# Altium PCB HandleBoard.PcbDoc
Units mm, origin at the board's own origin, x right, y up, seen from the top; angles counter-clockwise.
Board outline 50 x 50 mm, 2 copper layers (Top Layer, Bottom Layer); 26 components, 0 nets, 60 pads, 0 vias.
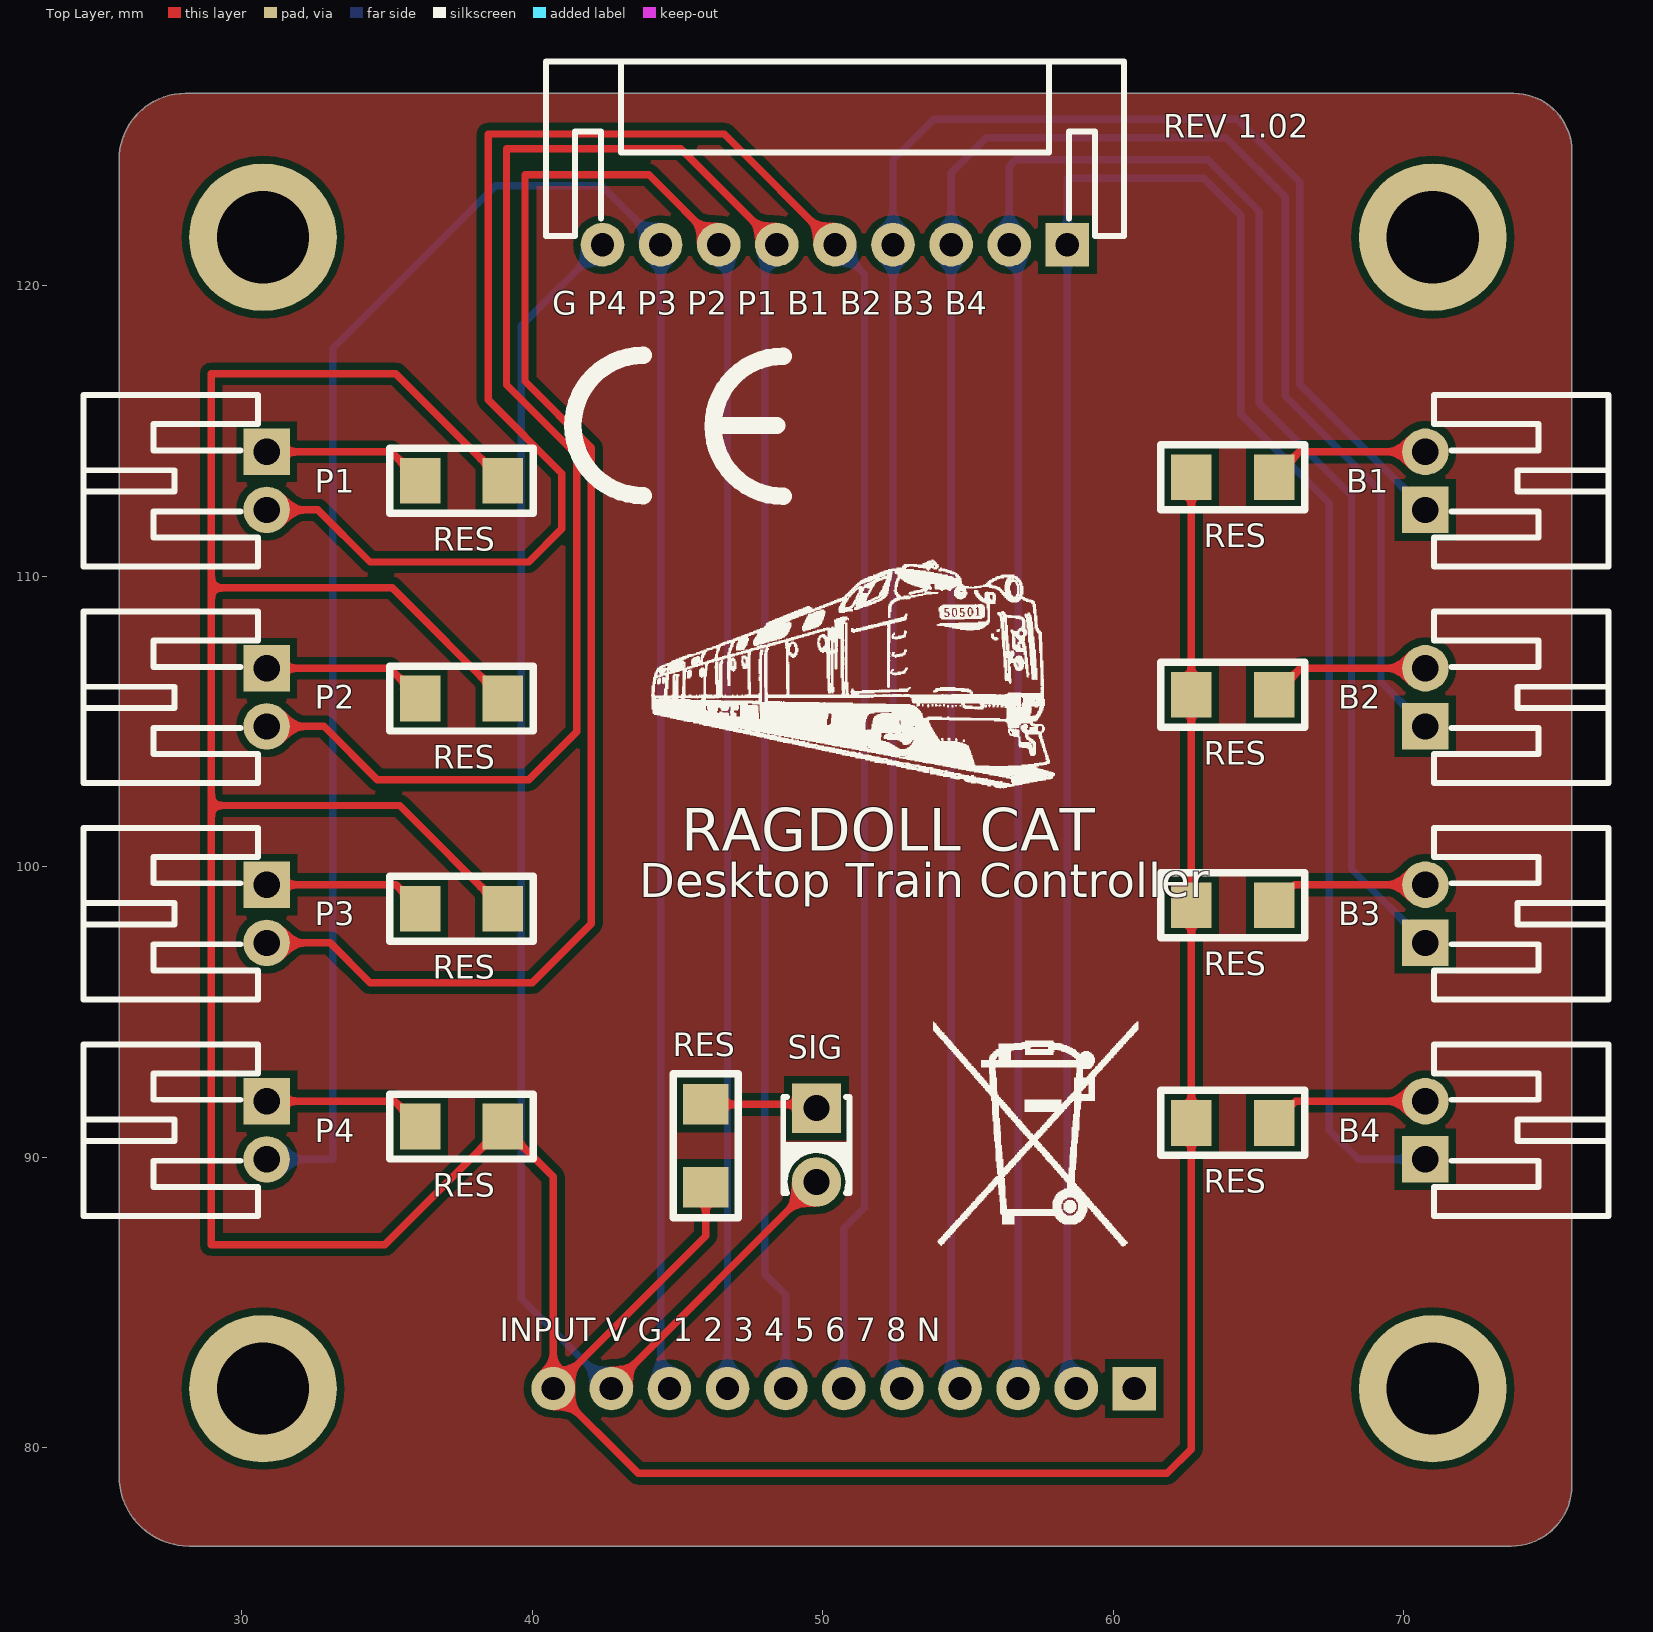
[diagram p0: Top Layer view]
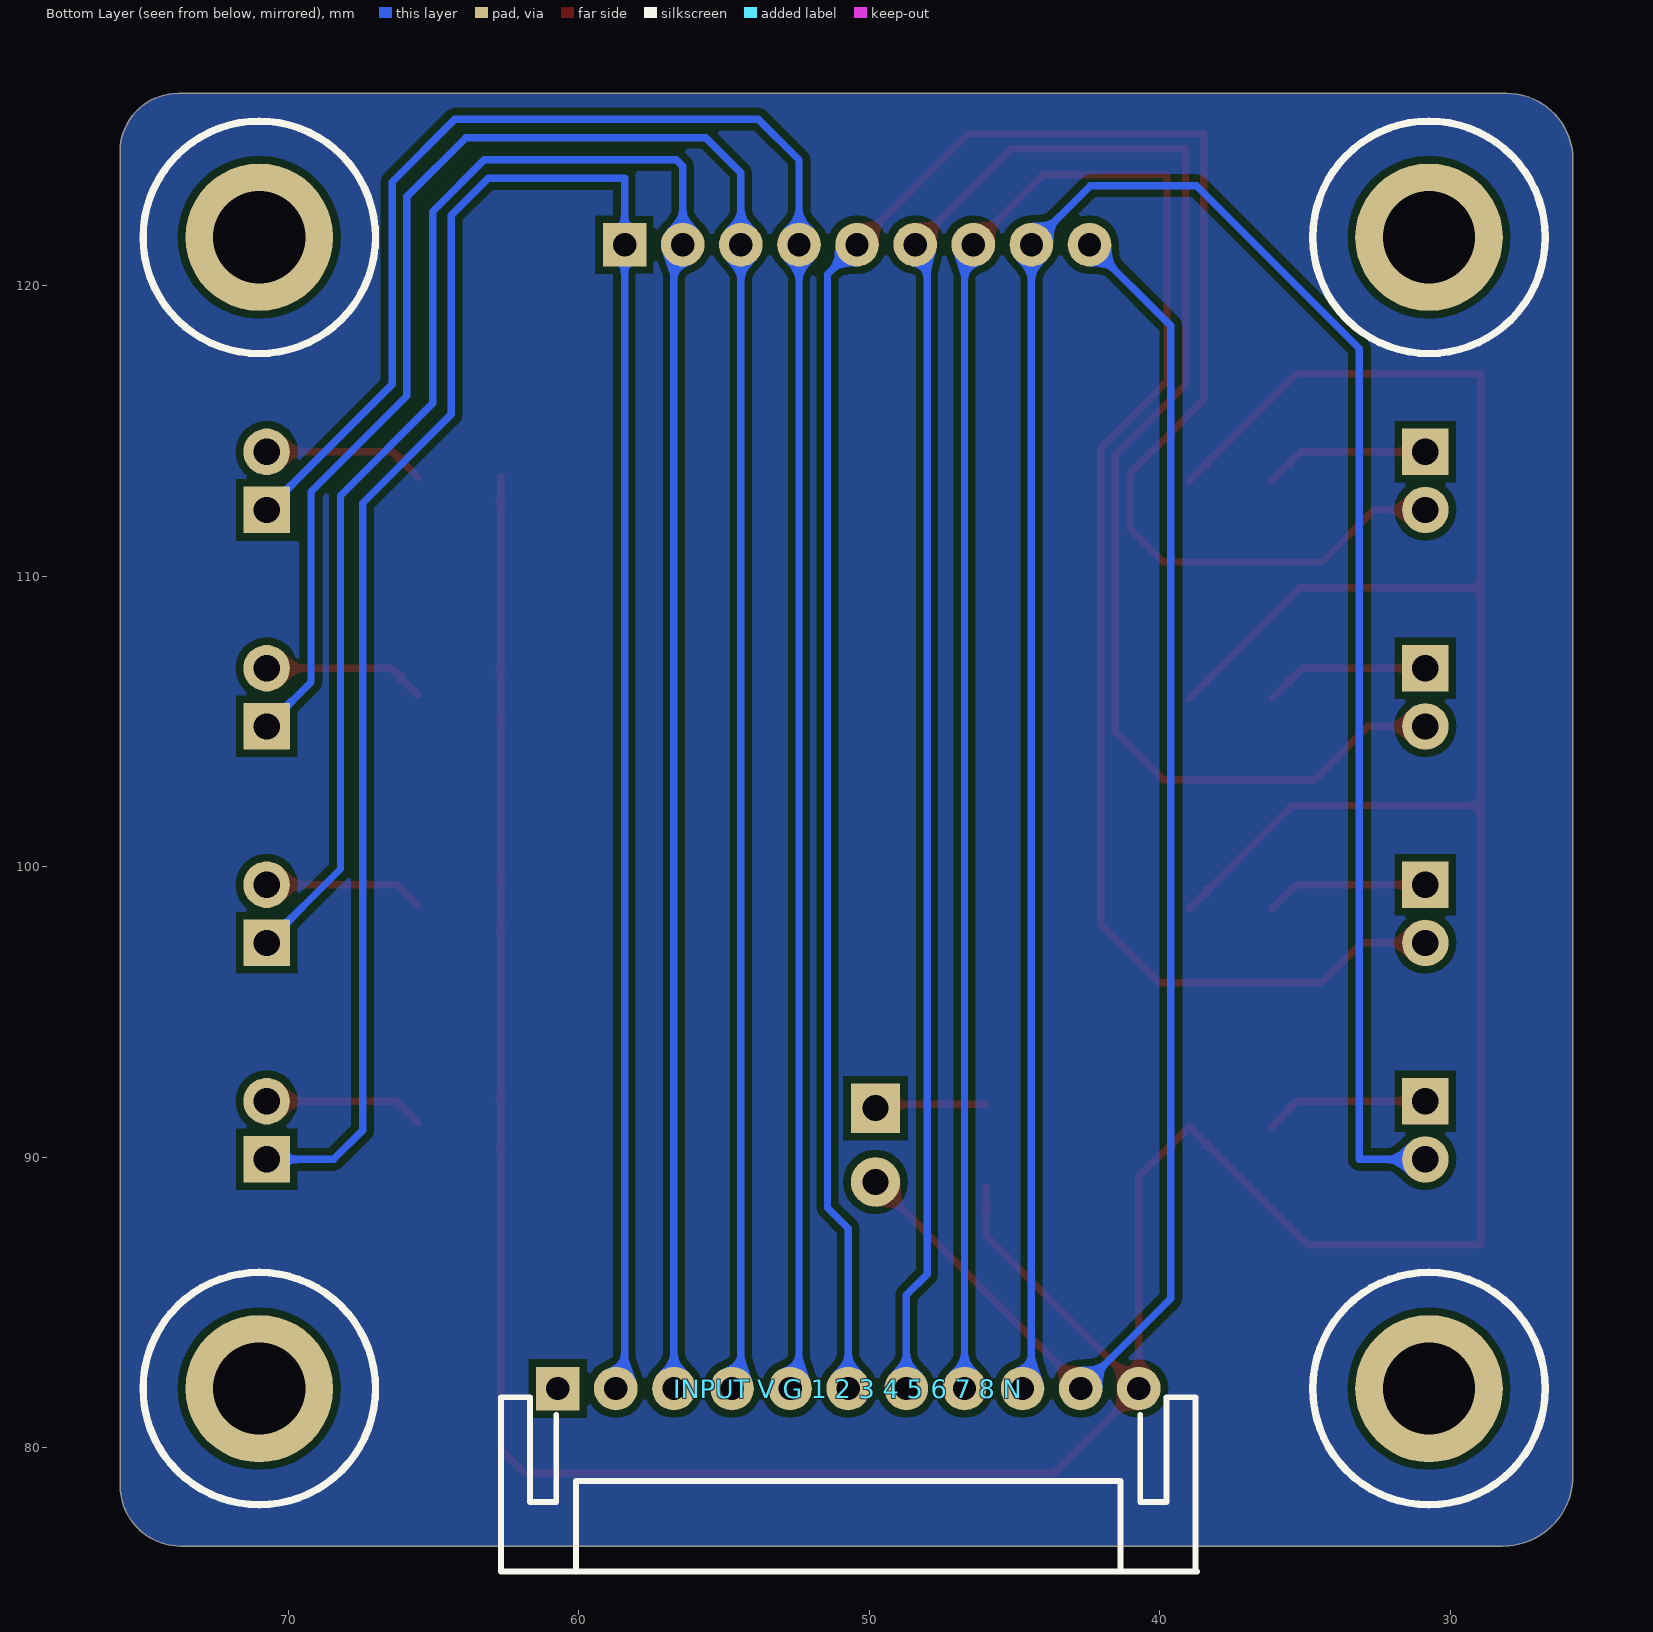
[diagram p1: Bottom Layer view, seen from below]

## Layer stack, top to bottom
Top Solder: solder mask 0.0102, Solder Resist, Dk 3.5
Top Layer: signal copper 0.0356
Dielectric 1: dielectric 0.32, FR-4, Dk 4.8
Bottom Layer: signal copper 0.0356
Bottom Solder: solder mask 0.0102, Solder Resist, Dk 3.5

## Board outline
25.781,79.032 25.781,124.333 cw(c28.067,124.333) 28.067,126.619 73.787,126.619 cw(c73.787,124.625) 75.781,124.625 75.781,78.702 cw(c73.698,78.702) 73.698,76.619 28.194,76.619 cw(c28.194,79.032)

## Design rules (kind name [scope] priority, off if disabled: settings)
Clearance [All] p1: gap=0.254 ignorepadtopadclearanceinfootprint=FALSE except(0: Arc-Hole Track-Hole SMDPad-Hole THPad-Hole Via-Hole Fill-Hole Poly-Hole Region-Hole Text-Hole)
PolygonConnect [All] p1: connectstyle=Relief reliefconductorwidth=0.254 reliefentries=4 polygonreliefangle="90 Angle" airgapwidth=0.254
RoutingVias [All] p1: holewidth=0.711 width=1.27 viastyle="Through Hole" minholewidth=0.711 minwidth=1.27 maxholewidth=0.711 maxwidth=1.27
SolderMaskExpansion [All] p1: expansion=0.102
Width [All] p1: maxlimit=0.254 minlimit=0.254 preferedwidth=0.254
30 further rules are at their usual default settings.

## Components (designator, comment, footprint, x,y, rotation, side; value= is the part's Value field where it differs from the comment)
B1 "Comment" PH2.0-WI-2P 70.739,113.284 r90 top
B2 "Comment" PH2.0-WI-2P 70.739,105.833 r90 top
B3 "Comment" PH2.0-WI-2P 70.739,98.383 r90 top
B4 "Comment" PH2.0-WI-2P 70.739,90.932 r90 top
"G P4 P3 P2 P1 B1 B2 B3 B4" "Comment" PH2.0-WI-9P 50.419,121.412 r180 top
"INPUT V G 1 2 3 4 5 6 7 8 N" "Comment" PH2.0-WI-11P 50.723,82.042 r180 bottom
P1 "Comment" PH2.0-WI-2P 30.861,113.284 r270 top
P2 "Comment" PH2.0-WI-2P 30.861,105.833 r270 top
P3 "Comment" PH2.0-WI-2P 30.861,98.383 r270 top
P4 "Comment" PH2.0-WI-2P 30.861,90.932 r270 top
RES "Comment" "R 1206-HP_L" 64.135,113.411 r180 top
RES "Comment" "R 1206-HP_L" 64.135,105.918 r180 top
RES "Comment" "R 1206-HP_L" 64.135,98.679 r180 top
RES "Comment" "R 1206-HP_L" 64.135,91.186 r180 top
RES "Comment" "R 1206-HP_L" 37.592,91.059 r180 top
RES "Comment" "R 1206-HP_L" 37.592,98.552 r180 top
RES "Comment" "R 1206-HP_L" 37.592,105.791 r180 top
RES "Comment" "R 1206-HP_L" 37.592,113.284 r180 top
RES "Comment" "R 1206-HP_L" 45.974,90.424 r270 top
SIG "Comment" "LED F234-Y" 49.784,90.424 r270 top
? "Comment" ICO3 57.379,90.805 r0 top
? "Comment" CE 43.815,115.189 r0 top
? "Comment" M3x12_L 70.993,82.042 r180 bottom
? "Comment" M3x12_L 30.734,82.042 r180 bottom
? "Comment" M3x12_L 70.993,121.666 r180 bottom
? "Comment" M3x12_L 30.734,121.666 r180 bottom

## Footprints (in the part's own frame and the unit in brackets; to place one, negate y for a bottom-side part, rotate by r counter-clockwise, add the part's x,y. Pads: shape width x height; smd on the part's side, far side on the other; paste and mask are expansions set on the pad)
CE [mm]
  silkscreen extent -2.41,-2.44 4.83,2.41
ICO3 [mm]
  silkscreen extent -3.58,-3.86 3.48,3.86
"LED F234-Y" [mm] "黄色2mm*3mm*4mm(长*宽*高)"
  rect 1.7x1.7 hole 0.9: 1(-1.27,0)
  round 1.7 hole 0.9: 2(1.27,0)
  silkscreen extent -1.65,-1.14 1.65,1.14, body extent -1.52,-1 1.52,1, height 4.05
M3x12_L [mm] "M3铜柱，长：12mm"
  round 5.08 hole 3.175: 1(0,0)
  silkscreen extent -4,-4 4,4, body extent -2.7,-2.35 2.7,2.35, height 12.05
PH2.0-WI-2P [mm] "长：5.9mm，宽：6mm，高：4.7mm"
  rect 1.6x1.6 hole 0.9: 1(-1,0)
  round 1.6 hole 0.9: 2(1,0)
  silkscreen extent -2.95,-6.3 2.95,-0.3, body extent -2.95,-6.3 2.95,0.3, height 4.75
PH2.0-WI-9P [mm] "长：19.9mm，宽：6mm，高：4.7mm"
  rect 1.5x1.5 hole 0.8: 1(-8,0)
  round 1.5 hole 0.8: 2(-6,0) 3(-4,0) 4(-2,0) 5(0,0) 6(2,0) 7(4,0) 8(6,0) 9(8,0)
  silkscreen extent -9.95,-6.3 9.95,-0.3, body extent -9.95,-6.3 9.95,0.3, height 4.75
PH2.0-WI-11P [mm] "长：23.9mm，宽：6mm，高：4.7mm"
  rect 1.5x1.5 hole 0.8: 1(-10,0)
  round 1.5 hole 0.8: 2(-8,0) 3(-6,0) 4(-4,0) 5(-2,0) 6(0,0) 7(2,0) 8(4,0) 9(6,0) 10(8,0) 11(10,0)
  silkscreen extent -11.95,-6.3 12,-0.3, body extent -11.95,-6.3 11.95,0.3, height 4.75
"R 1206-HP_L" [mil] "1/4W高精度贴片电阻"
  rect 55x62 smd: 1(-55.12,0) 2(57.09,0)
  silkscreen extent -96,-44 98,44, body extent -63,-31 63,32, height 22

## Nets (pads, with @x,y where several pads share a name; then routed paths per layer and width w, separated by ;. In a path a pad name is that pad's centre, name@x,y a point inside that pad or via, vN(x,y) a via of type N, cw(c..) or ccw(c..) an arc to the next point about the centre after c; other vN are vias at no path point)
pads on no net: "G P4 P3 P2 P1 B1 B2 B3 B4.1" "G P4 P3 P2 P1 B1 B2 B3 B4.2" "G P4 P3 P2 P1 B1 B2 B3 B4.3" "G P4 P3 P2 P1 B1 B2 B3 B4.4" "G P4 P3 P2 P1 B1 B2 B3 B4.5" "G P4 P3 P2 P1 B1 B2 B3 B4.6" "G P4 P3 P2 P1 B1 B2 B3 B4.7" "G P4 P3 P2 P1 B1 B2 B3 B4.8" "G P4 P3 P2 P1 B1 B2 B3 B4.9" "INPUT V G 1 2 3 4 5 6 7 8 N.1" "INPUT V G 1 2 3 4 5 6 7 8 N.2" "INPUT V G 1 2 3 4 5 6 7 8 N.3" "INPUT V G 1 2 3 4 5 6 7 8 N.4" "INPUT V G 1 2 3 4 5 6 7 8 N.5" "INPUT V G 1 2 3 4 5 6 7 8 N.6" "INPUT V G 1 2 3 4 5 6 7 8 N.7" "INPUT V G 1 2 3 4 5 6 7 8 N.8" "INPUT V G 1 2 3 4 5 6 7 8 N.9" "INPUT V G 1 2 3 4 5 6 7 8 N.10" "INPUT V G 1 2 3 4 5 6 7 8 N.11" ?.1 B1.1 B1.2 B2.1 B2.2 B3.1 B3.2 B4.1 B4.2 P1.1 P1.2 P2.1 P2.2 P3.1 P3.2 P4.1 P4.2 RES.1 RES.2 SIG.1 SIG.2
copper on no net: | length 897
  Top Layer w0.254: 28.956,102.108 35.436,102.108 38.992,98.552 ; 28.956,109.601 35.182,109.601 38.992,105.791 ; 30.861,91.932 35.269,91.932 36.142,91.059 ; 30.861,97.383 33.046,97.383 34.417,96.012 40.005,96.012 42.037,98.044 42.037,114.427 39.751,116.713 39.751,123.825 44.006,123.825 46.419,121.412 ; 30.861,99.383 35.311,99.383 36.142,98.552 ; 30.861,104.833 32.835,104.833 34.671,102.997 39.878,102.997 41.529,104.648 41.529,114.173 39.116,116.586 39.116,124.714 45.117,124.714 48.419,121.412 ; 30.861,106.833 35.1,106.833 36.142,105.791 ; 30.861,112.284 32.623,112.284 34.417,110.49 39.878,110.49 41.021,111.633 41.021,113.538 38.481,116.078 38.481,125.222 46.609,125.222 50.419,121.412 ; 30.861,114.284 35.142,114.284 36.142,113.284 ; 38.992,113.284 35.309,116.967 28.956,116.967 28.956,86.995 34.928,86.995 38.992,91.059 40.723,89.328 40.723,82.042 ; 42.723,82.042 42.723,82.093 49.784,89.154 ; 45.974,88.974 45.974,87.293 40.723,82.042 ; 45.974,91.824 49.654,91.824 49.784,91.694 ; 62.685,113.411 62.685,105.918 62.685,98.679 62.685,91.186 62.685,79.957 61.849,79.121 43.644,79.121 40.723,82.042 ; 65.535,91.186 66.281,91.932 70.739,91.932 ; 65.535,98.679 66.239,99.383 70.739,99.383 ; 65.535,105.918 66.45,106.833 70.739,106.833 ; 65.535,113.411 66.408,114.284 70.739,114.284
  Bottom Layer w0.254: 30.861,89.932 33.131,89.932 33.131,117.84 38.735,123.444 42.387,123.444 44.419,121.412 44.419,82.346 44.723,82.042 ; 42.419,121.412 39.624,118.617 39.624,85.141 42.723,82.042 ; 46.419,121.412 46.723,121.108 46.723,82.042 ; 48.419,121.412 48.006,120.999 48.006,85.979 48.723,85.262 48.723,82.042 ; 50.419,121.412 51.435,120.396 51.435,88.265 50.723,87.553 50.723,82.042 ; 52.723,82.042 52.419,82.346 52.419,121.412 52.419,124.333 53.816,125.73 64.262,125.73 66.421,123.571 66.421,116.602 70.374,112.649 70.739,112.284 ; 54.723,82.042 54.419,82.346 54.419,121.412 54.419,123.888 55.626,125.095 63.881,125.095 65.913,123.063 65.913,116.205 69.215,112.903 69.215,106.357 70.739,104.833 ; 56.723,82.042 56.723,121.108 ; 58.723,82.042 58.419,82.346 58.419,121.412 58.419,121.792 58.419,123.698 63.119,123.698 64.389,122.428 64.389,115.57 67.437,112.522 67.437,90.932 68.437,89.932 70.739,89.932 ; 70.739,97.383 68.199,99.923 68.199,112.776 65.024,115.951 65.024,122.555 63.246,124.333 56.642,124.333 56.419,124.11 56.419,121.412 ; 56.419,121.412 56.723,121.108 ; 56.419,121.412 56.723,121.108

## Polygon pours and split planes (outlines as drawn)
no net on Top Layer "Top Layer-No Net" (solid, pour order 2): 25.781,79.032 25.781,124.333 cw(c28.067,124.333) 28.067,126.619 73.787,126.619 cw(c73.787,124.625) 75.781,124.625 75.781,78.702 cw(c73.698,78.702) 73.698,76.619 28.194,76.619 cw(c28.194,79.032)
no net on Bottom Layer "Top Layer-No Net1" (solid, pour order 3): 25.781,79.032 25.781,124.333 cw(c28.067,124.333) 28.067,126.619 73.787,126.619 cw(c73.787,124.625) 75.781,124.625 75.781,78.702 cw(c73.698,78.702) 73.698,76.619 28.194,76.619 cw(c28.194,79.032)

## Silkscreen, mask and mechanical layers (free items; w line width, h text height)
Top Overlay:
  drawing of 3490 lines, arcs and shapes, not listed
  text "REV 1.02" at 61.722,125.095 h0.8
  text "RAGDOLL CAT" at 45.136,100.076 h2.5
  text "Desktop Train Controller" at 43.688,98.552 h2
Drill Drawing:
  the board outline again, w0.254